# Altium PCB 电子脚扣终端主控板.PcbDoc
Units mil, origin at the board's own origin, x right, y up, seen from the top; angles counter-clockwise.
Board outline 1283.46 x 858.27 mil, 2 copper layers (Top Layer, Bottom Layer), stack 42.17 mil thick; 40 components, 27 nets, 159 pads, 28 vias.
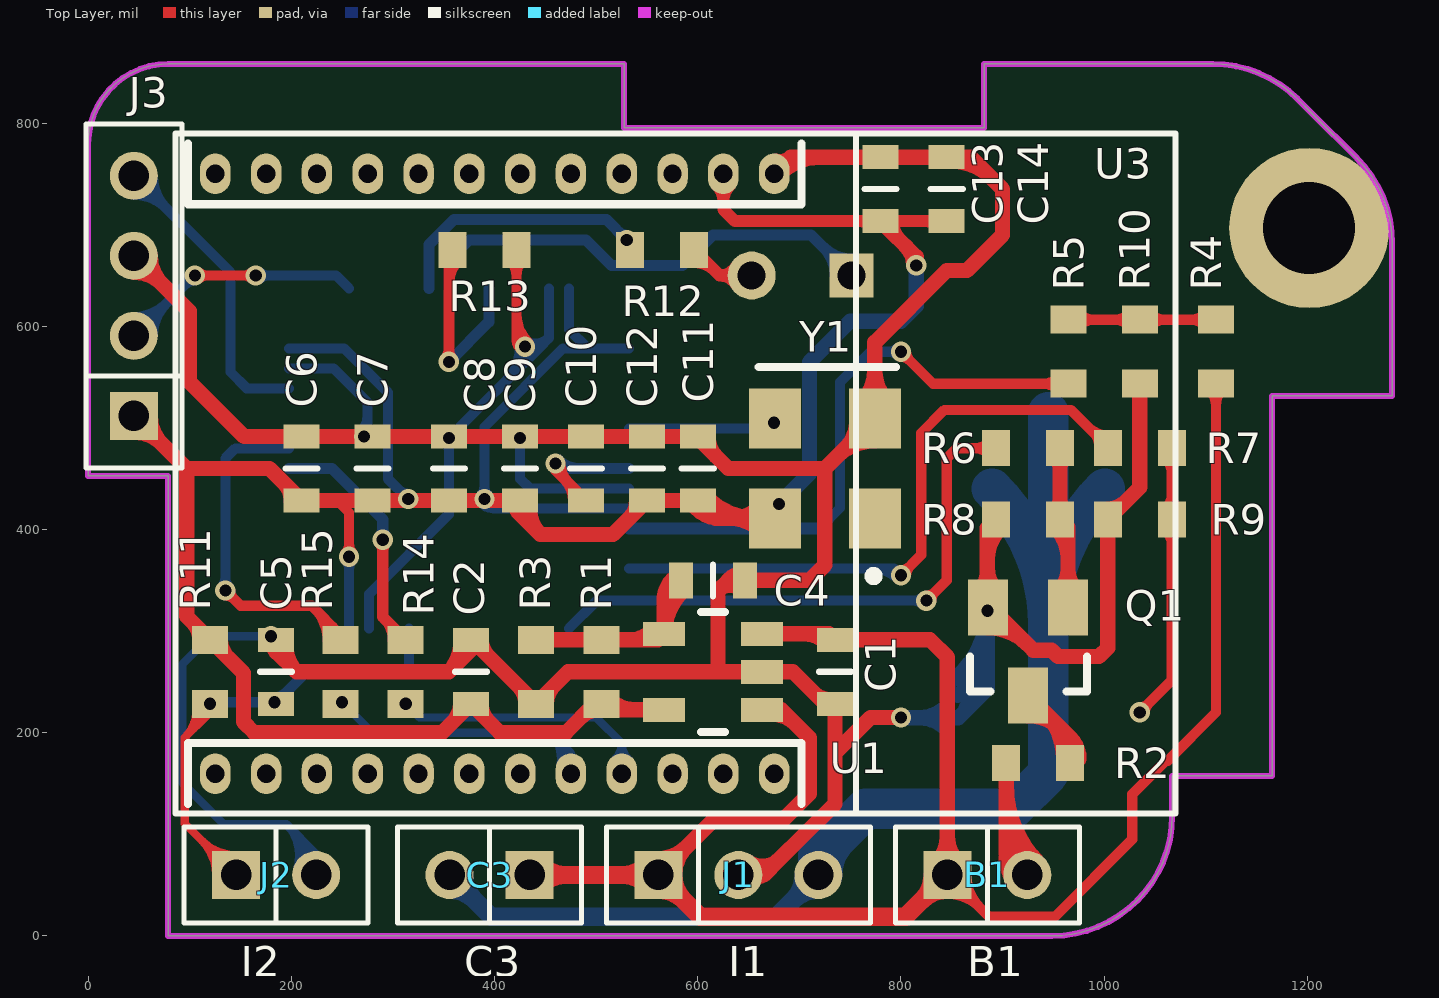
[diagram p0: Top Layer view]
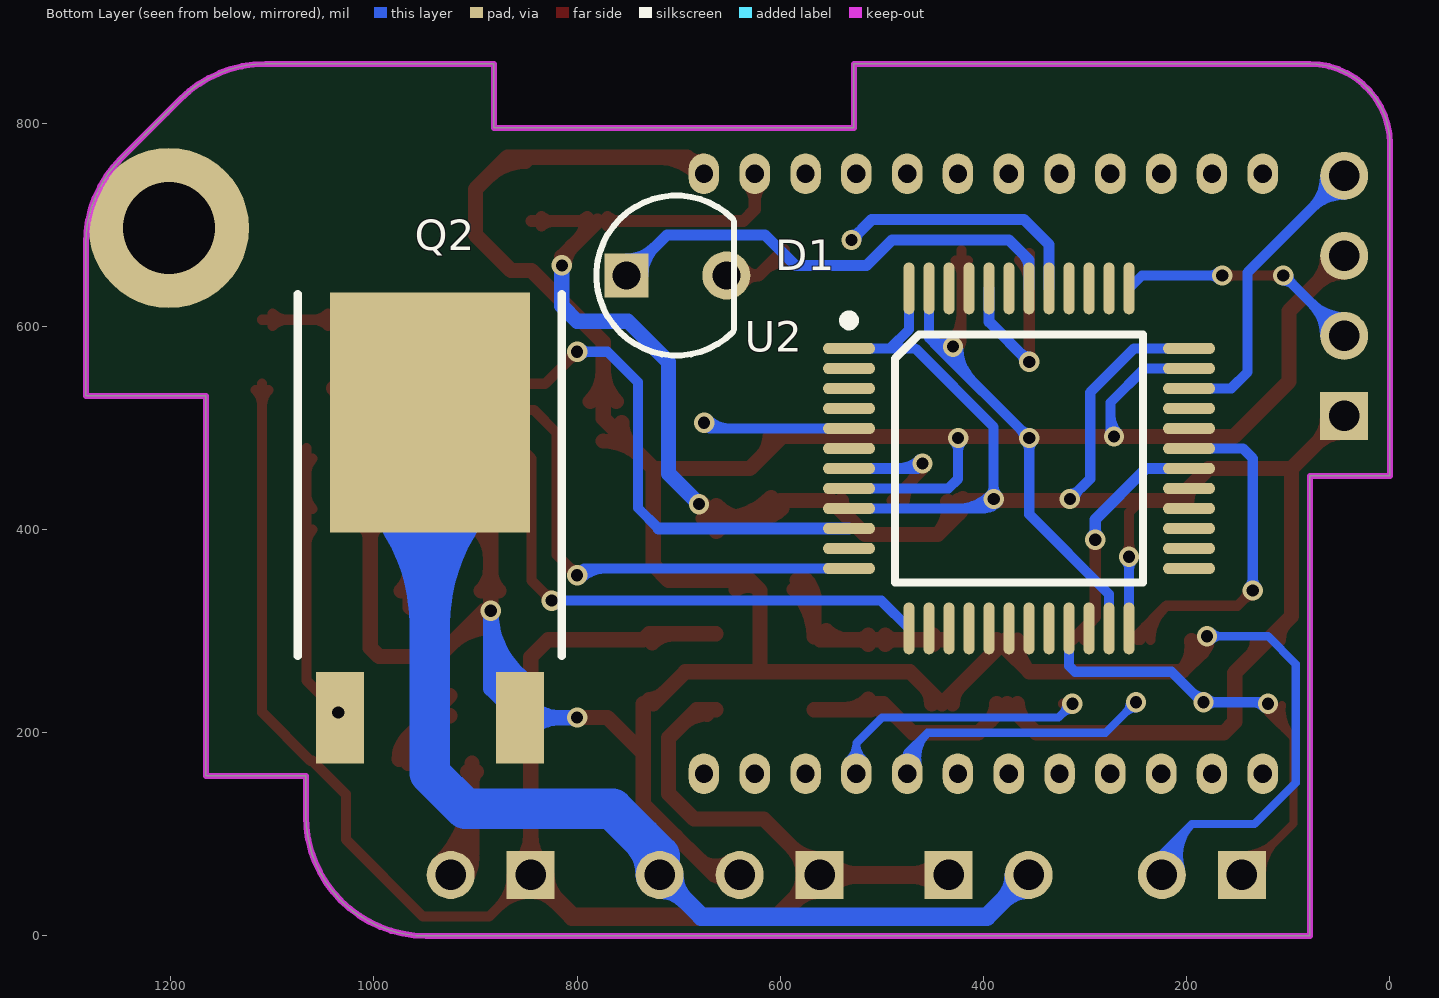
[diagram p1: Bottom Layer view, seen from below]
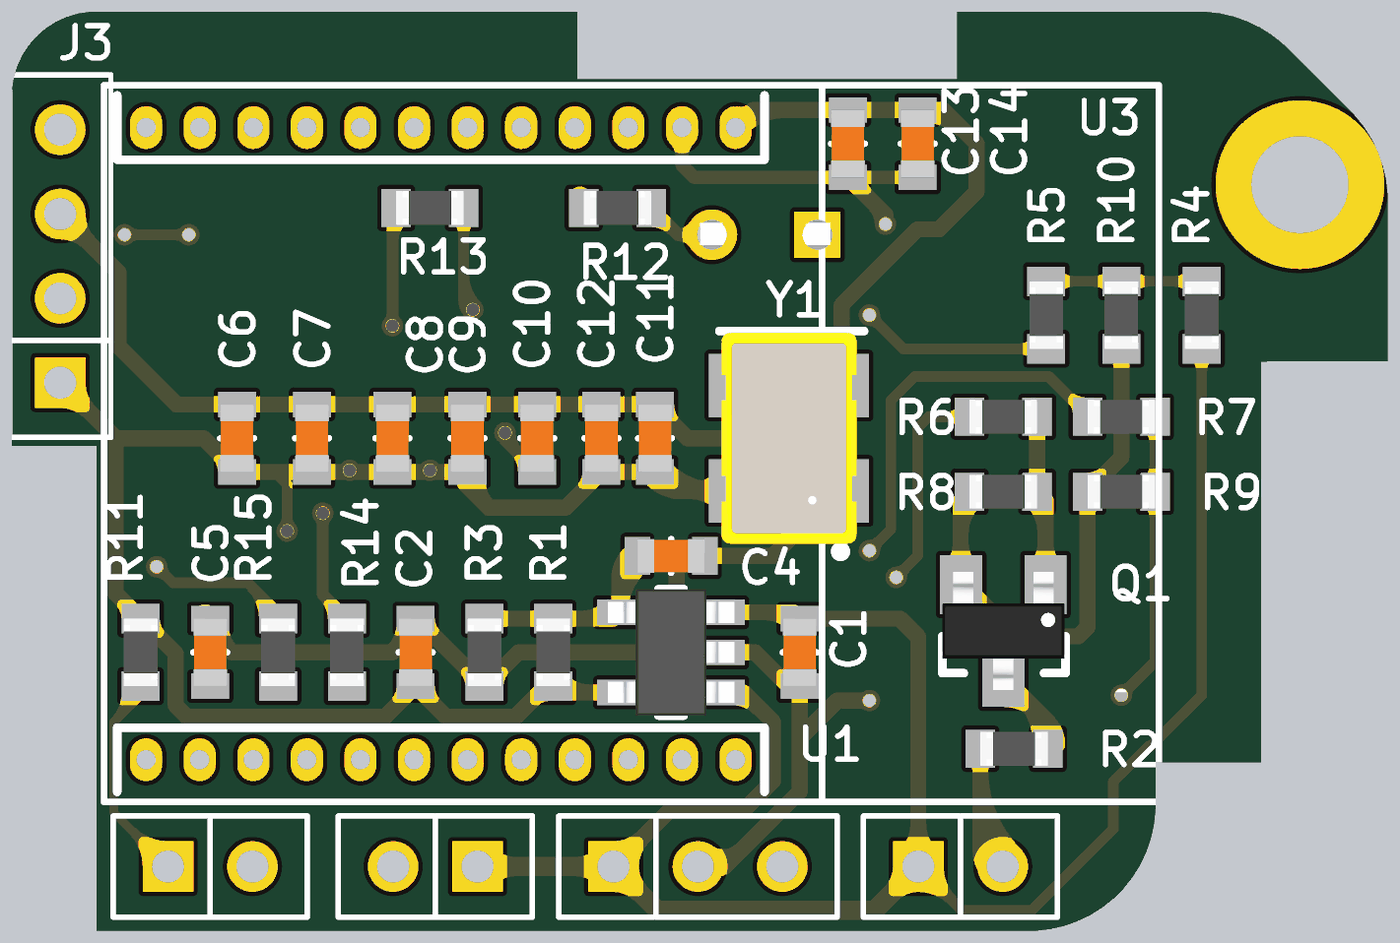
[diagram p2: 3D render of the assembled board from above, using the file's embedded part models]
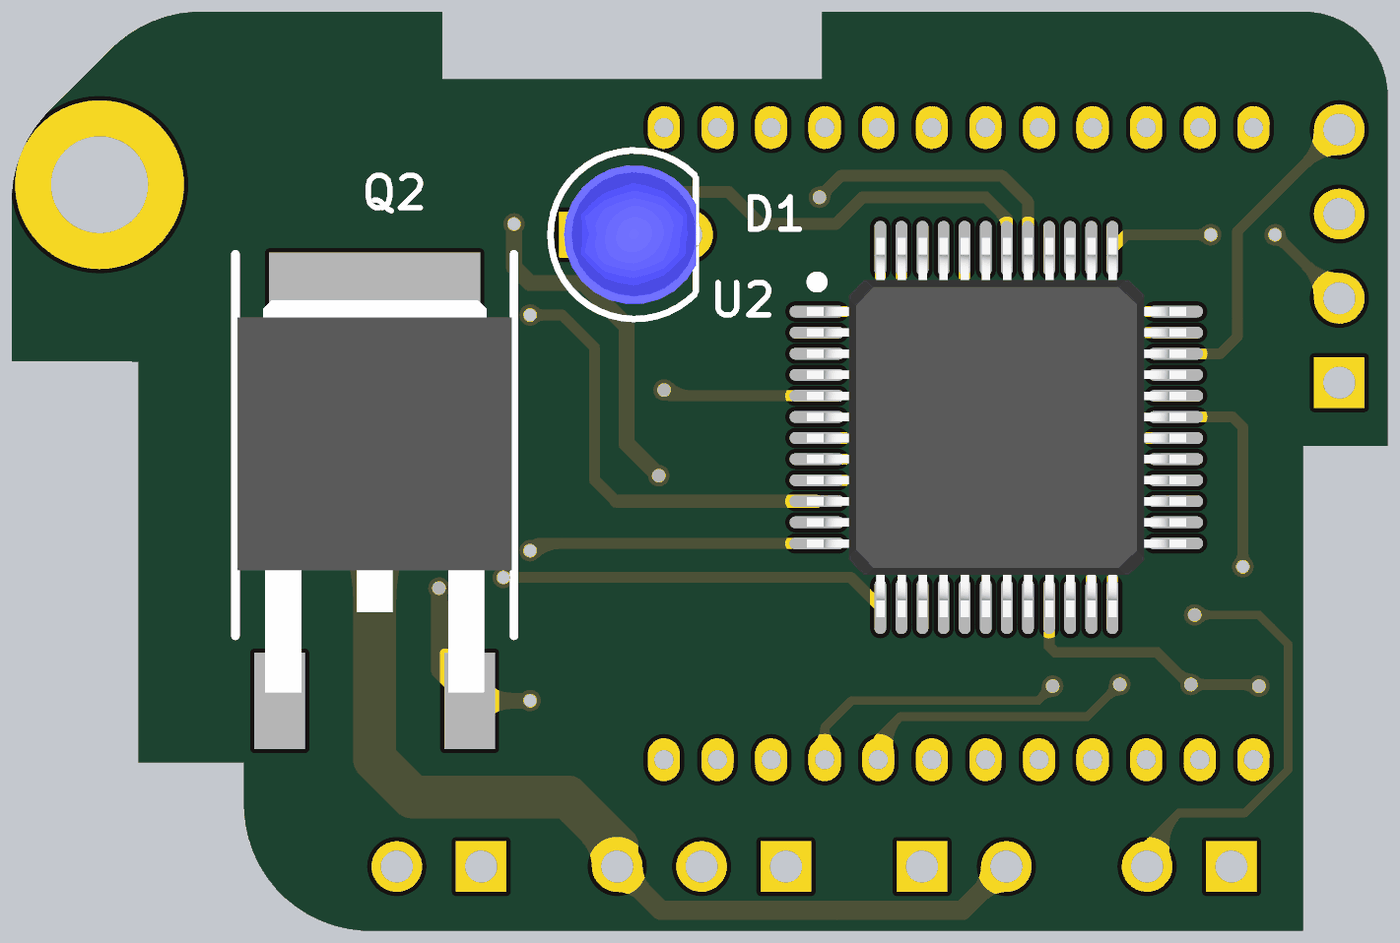
[diagram p3: 3D render of the assembled board from below, using the file's embedded part models]

## Layer stack, top to bottom
Top Solder: solder mask 0.4, Solder Resist, Dk 3.5
Top Layer: signal copper 1.4
Dielectric 1: dielectric 39.3701, FR-4, Dk 4.8
Bottom Layer: signal copper 1.4
Bottom Solder: solder mask 0.4, Solder Resist, Dk 3.5

## Board outline
78.73,0 78.73,452.76 -0.01,452.76 -0.01,779.53 cw(c78.73,779.53) 78.73,858.27 527.54,858.27 527.54,795.28 881.87,795.28 881.87,858.27 1106.88,858.27 cw(c1106.88,740.16) 1190.39,823.67 1203.83,810.24 1248.85,765.21 cw(c1165.34,681.7) 1283.45,681.7 1283.45,531.5 1165.34,531.5 1165.34,157.48 1066.91,157.48 1066.91,118.11 cw(c948.8,118.11) 948.8,0

## Design rules (kind name [scope] priority, off if disabled: settings)
Clearance [All] p1: gap=7
ComponentClearance [All] p1: gap=0 collisioncheckmode=3 verticalgap=0 showdistances=FALSE
Height [All] p1: minheight=0 maxheight=2000 prefheight=500
HoleSize [All] p1: absolutevalues=TRUE maxlimit=200 minlimit=1 maxpercent=80.000 minpercent=20.000
HoleToHoleClearance [All] p1: gap=6 allowstackedmicrovias=TRUE
MinimumSolderMaskSliver [All] p1: minsoldermaskwidth=0
PlaneConnect [All] p1: planeconnectstyle=Direct reliefexpansion=20 reliefentries=4 reliefconductorwidth=10 reliefairgap=10
PolygonConnect [All] p1: connectstyle=Direct reliefconductorwidth=10 reliefentries=4 polygonreliefangle="90 Angle" airgapwidth=10
RoutingVias [All] p1: holewidth=28 width=50 viastyle="Through Hole" minholewidth=8 minwidth=12 maxholewidth=200 maxwidth=300
SilkToSilkClearance [All] p1: silktosilkclearance=0
SilkToSolderMaskClearance [IsPad] p1: minsilkscreentomaskgap=0 clearancetoexposedcopper=TRUE
SolderMaskExpansion [All] p1: expansion=4
Width [All] p1: maxlimit=157.48 minlimit=8 preferedwidth=10
21 further rules are at their usual default settings.

## Components (designator, comment, footprint, x,y, rotation, side; value= is the part's Value field where it differs from the comment)
B1 "beep" Jk1*2-2.0 885,60 r0 top
C1 "10uF" C0603 735,260 r90 top
C2 "2.2uF" C0603 376.67,260 r90 top
C3 "470uF/16V" Jk1*2-2.0 395,60 r180 top
C4 "470pF" C0603 615,350 r0 top
C5 "0.1uF" C0603 185,260 r90 top
C6 "0.1uF" C0603 210,460 r90 top
C7 "0.1uF" C0603 280,460 r90 top
C8 "0.1uF" C0603 355,460 r90 top
C9 "0.1uF" C0603 425,460 r90 top
C10 "0.1uF" C0603 490,460 r90 top
C11 "10uF" C0603 600,460 r270 top
C12 "10uF" C0603 550,460 r270 top
C13 "0.1uF" C0603 780,735 r90 top
C14 "0.1uF" C0603 845,735 r90 top
D1 "LED" Led-D3 702.26,650 r180 bottom
J1 "Jack 1x3" Jk1*3-2.0 640,60 r0 top
J2 "Jack 1x2" Jk1*2-2.0 185,60 r0 top
J3 "SHD1X4-2.00" Jk1*4-2.0 45,630 r90 top
Q1 "S8050" SOT-23 925,280 r180 top
Q2 "NJD35N04G" TO-252 945,365 r180 bottom locked
R1 "300K" R0603 505,260 r90 top
R2 "0R" R0603 935,170 r180 top
R3 "100K" R0603 440.83,260 r270 top
R4 "5K" R0603 1110,575 r90 top
R5 "1K" R0603 965,575 r270 top
R6 "1K" R0603 925,480 r0 top
R7 "1K" R0603 1035,480 r0 top
R8 "1K" R0603 925,410 r0 top
R9 "1K" R0603 1035,410 r0 top
R10 "1K" R0603 1035,575 r270 top
R11 "1K" R0603 120,260 r270 top
R12 "1K" R0603 565,675 r0 top
R13 "100K" R0603 390,675 r0 top
R14 "10R" R0603 312.5,260 r270 top
R15 "10R" R0603 248.33,260 r270 top
U1 "MIC5219YM5" SOT-23-5 615,260 r180 top
U2 "STM32F103CB" LQF48 365,470 r180 bottom
U3 "ZG-Mxx" ZG-M0 400,455 r270 top locked
Y1 "XTAL 8MHz" XTAL5032 725,460 r90 top

## Footprints (in the part's own frame and the unit in brackets; to place one, negate y for a bottom-side part, rotate by r counter-clockwise, add the part's x,y. Pads: shape width x height; smd on the part's side, far side on the other; paste and mask are expansions set on the pad)
C0603 [mm]
  rect 0.6x0.9 smd: 1(-0.8,0) 2(0.8,0)
  silkscreen extent 0,-0.4 0,0.4, body extent -0.8,-0.4 0.8,0.4, height 0.5
Jk1*2-2.0 [mm]
  rect 1.2x1.2 hole 0.762: 1(-1,0)
  round 1.2 hole 0.762: 2(1,0)
  silkscreen extent -2.3,-1.2 2.3,1.2
Jk1*3-2.0 [mm]
  rect 1.2x1.2 hole 0.762: 1(-2,0)
  round 1.2 hole 0.762: 2(0,0) 3(2,0)
  silkscreen extent -3.3,-1.2 3.3,1.2
Jk1*4-2.0 [mm] "4P，直插，2.0mm间距，排母"
  rect 1.2x1.2 hole 0.762: 1(-3,0)
  round 1.2 hole 0.762: 2(-1,0) 3(1,0) 4(3,0)
  silkscreen extent -4.3,-1.2 4.3,1.2, body extent -4.25,-1.22 4.25,1.18, height 4.3
Led-D3 [mm]
  rect 1.1x1.1 hole 0.7: 1(-1.25,0)
  round 1.2 hole 0.7: 2(1.25,0)
  silkscreen extent -2,-2 1.44,2, body extent -1.68,-1.65 1.53,1.65, height 4.98
LQF48 [mm]
  oval 1.3x0.28 smd: 1(-4.25,2.75) 2(-4.25,2.25) 3(-4.25,1.75) 4(-4.25,1.25) 5(-4.25,0.75) 6(-4.25,0.25) 7(-4.25,-0.25) 8(-4.25,-0.75) 9(-4.25,-1.25) 10(-4.25,-1.75) 11(-4.25,-2.25) 12(-4.25,-2.75) 25(4.25,-2.75) 26(4.25,-2.25) 27(4.25,-1.75) 28(4.25,-1.25) 29(4.25,-0.75) 30(4.25,-0.25) 31(4.25,0.25) 32(4.25,0.75) 33(4.25,1.25) 34(4.25,1.75) 35(4.25,2.25) 36(4.25,2.75)
  oval 0.28x1.3 smd: 13(-2.75,-4.25) 14(-2.25,-4.25) 15(-1.75,-4.25) 16(-1.25,-4.25) 17(-0.75,-4.25) 18(-0.25,-4.25) 19(0.25,-4.25) 20(0.75,-4.25) 21(1.25,-4.25) 22(1.75,-4.25) 23(2.25,-4.25) 24(2.75,-4.25) 37(2.75,4.25) 38(2.25,4.25) 39(1.75,4.25) 40(1.25,4.25) 41(0.75,4.25) 42(0.25,4.25) 43(-0.25,4.25) 44(-0.75,4.25) 45(-1.25,4.25) 46(-1.75,4.25) 47(-2.25,4.25) 48(-2.75,4.25)
  silkscreen extent -4.38,-3.1 3.1,3.57, body extent -4.5,-4.5 4.5,4.5, height 1.8
R0603 [mm]
  rect 0.7x0.9 smd: 1(-0.8,0) 2(0.8,0)
  body extent -0.8,-0.4 0.8,0.4, height 0.37
SOT-23 [mm]
  rect 1x1.4 smd: 1(-1,-1.1) 2(1,-1.1) 3(0,1.1)
  silkscreen extent -1.47,0.13 1.45,1, body extent -1.45,-1.4 1.45,1.4, height 1.3
SOT-23-5 [mm]
  rect 1.05x0.6 smd: 1(-1.225,0.95) 2(-1.225,0) 3(-1.225,-0.95) 4(1.225,-0.95) 5(1.225,0.95)
  silkscreen extent -0.3,-1.5 0.3,1.5, body extent -1.5,-1.5 1.5,1.5, height 1.2
TO-252 [mm]
  rect 1.2x2.28 smd: 1(-2.25,-3.816) 3(2.25,-3.816)
  rect 5x6 smd: 2(0,3.816)
  silkscreen extent -3.3,-2.27 3.3,6.78, body extent -3.25,-3.62 3.25,5.68, height 2.3
XTAL5032 [mm]
  rect 1.5x1.3 smd: 1(-1.25,-1.25) 2(1.25,-1.25) 3(1.25,1.25) 4(-1.25,1.25)
  silkscreen extent -2.81,-1.78 2.54,1.65, body extent -2.5,-1.6 2.5,1.6, height 1.2
ZG-M0 [mil]
  oval 40x30 hole 18: A1(-295.1,275.15) A2(-295.1,225.15) A3(-295.1,175.15) A4(-295.1,125.15) A5(-295.1,75.15) A6(-295.1,25.15) A7(-295.1,-24.85) A8(-295.1,-74.85) A9(-295.1,-124.85) A10(-295.1,-174.85) A11(-295.1,-224.85) A12(-295.1,-274.85) B1(295.26,275.15) B2(295.26,225.15) B3(295.26,175.15) B4(295.26,125.15) B5(295.26,75.15) B6(295.26,25.15) B7(295.26,-24.85) B8(295.26,-74.85) B9(295.26,-124.85) B10(295.26,-174.85) B11(295.26,-224.85) B12(295.26,-274.85)
  silkscreen extent -335,-314 335,670

## Part data
B1: library part Speaker, "Loudspeaker"
C1 C5 C6 C7 C8 C9 C10 C11 C12: library part "Cap Semi"
C2 C4: library part CAP, "CAP"
C3: library part "Cap Poll"
C13 C14: library part Cap, "Capacitor"
J1 J2: "插座"
J3: library part HEADER1X4
Q1: "NPN triode, 0.5A Max"
Q2: library part MJD122
R1 R2 R3 R4 R5 R10 R12 R13: library part Res
R6 R7 R8 R9 R11: library part RES, "Resistor"
R14 R15: library part Res, "Resistor"
U1: library part MIC5205
U2: library part STM32F103Cx
Y1: library part XTAL

## Free pads (board coordinates)
  round 157.48 hole 90.55: ""(1201.71,696.76)

## Via types
v1: diameter 20, hole 12, Top Layer to Bottom Layer, tented both sides, 28 vias

## Nets (pads, with @x,y where several pads share a name; then routed paths per layer and width w, separated by ;. In a path a pad name is that pad's centre, name@x,y a point inside that pad or via, vN(x,y) a via of type N, cw(c..) or ccw(c..) an arc to the next point about the centre after c; other vN are vias at no path point)
+3.3V: C2.1 C6.1 C7.1 C8.1 C9.1 C11.2 C12.2 C13.1 C14.1 J3.1 R1.1 R11.1 U1.5 U2.1 U2.9 U2.24 U2.36 U2.48 U3.A2 Y1.4 | length 3646.5
  Top Layer w10: 245,428.5 256.73,416.77 v1(256.73,373.27) ; v1@253.2,376.8 ccw(c244.66,385.34) 256.73,385.34 ccw(c268.8,385.34) v1@260.27,376.8
  Top Layer w12: U3.A2@618.79,738.74 cw(c603.42,723.37) 625.15,723.37 cw(c646.88,723.37) U3.A2@631.52,738.74 ; U3.A2 625.15,714.85 636.5,703.5 C13.1 C14.1 ; C13.1@769.99,699.39 ccw(c760.07,689.47) 760.07,703.5 ccw(c760.07,717.53) C13.1@769.99,707.61 ; C13.1@790.01,699.39 cw(c799.93,689.47) 799.93,703.5 cw(c799.93,717.53) C13.1@790.01,707.61 ; C14.1@834.99,699.39 ccw(c825.07,689.47) 825.07,703.5 ccw(c825.07,717.53) C14.1@834.99,707.61
  Top Layer w15: J3.1@45,495.77 cw(c45,456.85) 72.52,484.37 cw(c100.04,511.89) J3.1@61.12,511.89 ; J3.1 96.89,460 ; 102.56,308.94 cw(c85.12,291.5) R11.1@109.78,291.5 ; R11.1@130.22,291.5 ccw(c154.88,291.5) 137.44,274.06 ; 192.56,445.94 cw(c175.12,428.5) C6.1@199.78,428.5 ; 359.23,211.06 ccw(c341.79,228.5) C2.1@366.45,228.5 ; C2.1@386.88,228.5 ccw(c411.55,228.5) 394.11,211.06 ; C9.1@420.43,430.61 ccw(c437.57,427.16) 425.21,414.79 ; C9.1@435.13,427.65 ccw(c470.53,420.53) 445,395 ; 485.97,215.97 cw(c501.06,200.89) R1.1@501.06,222.22 ; R1.1@513.38,232.94 ccw(c538.35,257.92) 538.35,222.6 ; 532.56,411.06 ccw(c515.12,428.5) C12.2@539.78,428.5 ; U1.5 510.91,222.6 R1.1 498.5,228.5 470,200 405.17,200 C2.1 348.16,200 163.47,200 152.78,210.69 152.78,258.71 R11.1 96.89,314.61 96.89,460 ; C11.2@598.35,420.95 ccw(c622.87,445.47) 622.87,410.79 ; C11.2@608.95,431.55 ccw(c659.08,481.68) Y1.4@659.08,410.79 ; C11.2@610.22,428.5 ccw(c634.88,428.5) 617.44,411.06 ; 639.65,410.79 ccw(c639.65,465.35) Y1.4@678.23,426.77 ; Y1.4@663,398 ccw(c632.11,367.11) 632.11,410.79 ccw(c632.11,454.46) Y1.4@663,423.58 ; Y1.4 617.72,410.79 C11.2 C12.2 516.5,395 445,395 ; C13.1 815,668.5 v1(815,660) ; C13.1@790.22,703.5 ccw(c814.88,703.5) 797.44,686.06 ; 804.72,678.78 cw(c785.93,660) v1@812.5,660 ; 96.89,460 178.5,460 C6.1 245,428.5 C7.1 C8.1 C9.1 425,415 445,395
  Bottom Layer w10: U2.36 251.73,578.27 295,535 295,450 v1(315,430) ; v1@253.2,369.73 cw(c244.66,361.2) 256.73,361.2 cw(c268.8,361.2) v1@260.27,369.73 ; U2.24 v1(256.73,373.27) ; v1@310,430 ccw(c297.93,430) 306.46,438.54 ccw(c315,447.07) v1@315,435 ; v1@386.46,426.46 ccw(c400.17,440.17) 400.17,420.79 ; v1@386.46,433.54 ccw(c377.93,442.07) 390,442.07 ccw(c402.07,442.07) 393.54,433.54 ccw(c424.31,464.31) 424.31,420.79 ; U2.48 473.27,596.73 491.73,578.27 ; U2.9 399.21,420.79 v1(390,430) 390,500.96 467.31,578.27 491.73,578.27 ; U2.1 491.73,578.27
  Bottom Layer w15: v1(680,425) 710,455 710,565 750,605 800,605 815,620 v1(815,660)
ADPOW: R5.2 U2.10 | length 661.5
  Top Layer w10: v1@800,570 cw(c800,557.93) 808.54,566.46 cw(c817.07,575) v1@805,575 ; v1(800,575) 831.5,543.5 R5.2 ; R5.2@954.85,537.3 ccw(c939.87,522.31) 939.87,543.5 ccw(c939.87,564.7) R5.2@954.85,549.71
  Bottom Layer w10: 720,401.1 740,421.1 740,545 770,575 v1(800,575) ; v1@796.46,571.46 ccw(c787.93,562.93) 787.93,575 ccw(c787.93,587.07) v1@796.46,578.54
  Bottom Layer w12: U2.10 720,401.1
BAT: B1.1 C1.2 C3.1 J1.1 R4.1 U1.1 U1.3 | length 2360.5
  Top Layer w10: B1.1@845.63,41.38 cw(c845.63,-3.58) 877.42,28.21 cw(c909.21,60) B1.1@864.25,60 ; B1.1 886.63,19 951.59,19 1027.59,95 1027.59,139.37 1060.7,172.48 1062.48,172.48 1110,220 R4.1 ; R4.1@1103.79,537.3 cw(c1088.8,522.31) 1110,522.31 cw(c1131.2,522.31) R4.1@1116.21,537.3
  Top Layer w15: J1.1 616.26,115 685,115 710,140 710,195 682.4,222.6 U1.1 ; J1.1@561.26,76.12 ccw(c561.26,115.04) 588.78,87.52 ccw(c616.3,60) J1.1@577.38,60 ; U1.3 729.09,297.4 C1.2 828.5,291.5 845.63,274.37 B1.1 ; U1.1@672.09,218.29 cw(c672.09,182.98) 697.05,207.95 ; 704.43,297.4 cw(c704.43,266.83) C1.2@726.05,288.45 ; B1.1@834.23,71.4 ccw(c806.71,98.92) 845.63,98.92 ccw(c884.55,98.92) B1.1@857.03,71.4
  Top Layer w18: C3.1 J1.1 602.26,19 804.63,19 B1.1 ; C3.1@444.71,49.66 cw(c469.67,24.7) 469.67,60 cw(c469.67,95.3) C3.1@444.71,70.34 ; J1.1@550.92,49.66 ccw(c525.96,24.7) 525.96,60 ccw(c525.96,95.3) J1.1@550.92,70.34 ; J1.1@561.26,45.38 cw(c561.26,10.08) 586.22,35.04 cw(c611.18,60) J1.1@575.88,60 ; B1.1@831.01,60 cw(c795.71,60) 820.67,35.04 cw(c845.63,10.08) B1.1@845.63,45.38
BOOT0: R13.1 U2.44 | length 254.4
  Top Layer w11: v1@351.82,568.18 ccw(c344.14,575.86) 355,575.86 ccw(c365.86,575.86) v1@358.18,568.18 ; v1(355,565) R13.1@355,671.5 ; 355,642.62 cw(c386.95,642.62) R13.1@364.36,665.21
  Bottom Layer w11: v1(355,565) 394.53,604.53 U2.44 ; v1@355,569.5 ccw(c355,580.36) 362.68,572.68 ccw(c370.36,565) v1@359.5,565
CTRBEEP: R6.1 U2.13 | length 635.2
  Top Layer w10: v1(825,330) 845,350 845,470 855,480 R6.1 ; v1@825,335 ccw(c825,347.07) 833.54,338.54 ccw(c842.07,330) v1@830,330 ; R6.1@887.3,473.79 ccw(c872.31,458.8) 872.31,480 ccw(c872.31,501.2) R6.1@887.3,486.21
  Bottom Layer w10: U2.13 500.59,330 v1(825,330) ; v1@821.46,326.46 ccw(c812.93,317.93) 812.93,330 ccw(c812.93,342.07) v1@821.46,333.54
CTRSHOCK: R7.1 U2.12 | length 707.9
  Top Layer w10: v1(800,355) 820,375 820,495 842.72,517.72 967.24,517.72 1003.5,481.46 R7.1 ; v1@800,360 ccw(c800,372.07) 808.54,363.54 ccw(c817.07,355) v1@805,355 ; 984.29,500.68 ccw(c1003.5,519.89) R7.1@1003.5,492.72 ; R7.1@990.27,494.69 cw(c979.51,483.94) R7.1@994.72,483.94
  Bottom Layer w10: U2.12 793.27,361.73 v1(800,355) ; 771.68,361.73 cw(c771.68,326.68) v1@796.46,351.46
DECCUT: C5.1 J2.1 R11.2 U2.21 | length 723.6
  Top Layer w8: 103.74,203.74 ccw(c78.98,228.5) R11.2@114,228.5 ; R11.2@106.34,227.41 cw(c67.02,222.99) 95,195 ; 106.75,206.75 ccw(c88.14,225.36) R11.2@114.29,228.3 ; R11.2@113.15,220.72 cw(c127.32,218.58) R11.2@118.81,230.11 ; R11.2@117.4,217.4 ccw(c106.3,228.5) R11.2@122,228.5 ; v1(120,228.5) 120,220 95,195 ; J2.1@126.01,60 ccw(c78.64,60) 112.13,93.5 ccw(c145.63,126.99) J2.1@145.63,79.62 ; J2.1@134.01,60 ccw(c105.95,60) 125.79,79.84 ccw(c145.63,99.68) J2.1@145.63,71.62 ; J2.1 95,110.63 95,195
  Top Layer w10: v1(183.5,230) C5.1
  Bottom Layer w10: v1(120,228.5) 121.5,230 v1(183.5,230) 185,230 215,260 310,260 315.79,265.79 U2.21 ; v1@123.54,224.97 cw(c135.68,212.82) 135.68,230 ; v1@179.97,226.46 ccw(c171.43,217.93) 171.43,230 ccw(c171.43,242.07) v1@179.97,233.54 ; v1@183.5,235 ccw(c183.5,250.68) 194.59,239.59
GND: C1.1 C2.2 C4.2 C5.2 C6.2 C7.2 C8.2 C9.2 C10.2 C11.1 C12.1 C13.2 C14.2 J1.2 J2.2 J3.3 Q1.2 Q2.3 R3.2 R8.1 R9.1 R10.2 R13.2 U1.2 U2.8 U2.23 U2.35 U2.47 U3.A1 Y1.2 | length 6079.2
  Top Layer w10: R13.2@415.29,664.85 cw(c400.3,649.87) 421.5,649.87 cw(c442.69,649.87) R13.2@427.7,664.85 ; 421.5,588.46 ccw(c438.46,588.46) v1@426.46,576.46 ; 421.5,612.6 ccw(c462.6,612.6) v1@433.54,583.54 ; R13.2 421.5,588.5 ; v1@425,580.01 ccw(c413.04,580.05) 421.5,588.5 ; v1(430,580) 421.5,588.5 ; v1@429.99,585 cw(c429.95,596.96) 421.5,588.5
  Top Layer w15: J3.3@45,653.25 cw(c45,614.33) 72.52,641.85 cw(c100.04,669.37) J3.3@61.12,669.37 ; J3.3 99.37,615 99.37,545.63 153.5,491.5 C6.2 v1(271.5,491.5) C7.2 C8.2 C9.2 C10.2 C12.1 C11.1 600,490 630,460 725,460 ; C5.2@178.42,293.06 cw(c167.08,279.19) 185,279.19 ; C5.2@180.36,293.27 ccw(c194.7,290.86) C5.2@184.42,280.58 ; C5.2@182.3,294.02 ccw(c194,289) C5.2@185,280 ; C5.2@182.5,295 ccw(c212.68,295) 191.34,273.66 ; C5.2 C5.2@185,280 ; C5.2@195.16,290.78 ccw(c229.94,284.94) 205,260 ; C2.2@366.46,291.15 cw(c327.02,287.98) 355,260 ; C2.2@386.88,291.5 ccw(c408.71,291.5) 393.28,276.06 ; 423.39,245.94 cw(c405.95,228.5) R3.2@430.62,228.5 ; R3.2@451.05,228.5 cw(c475.71,228.5) 458.27,245.94 ; C11.1@610.22,491.5 ccw(c638.49,491.5) 618.5,471.5 ; 631.39,351.39 cw(c642.86,339.91) C4.2@653.5,352.17 ; J1.2 665,60 ; J1.2@640.66,60.91 ccw(c653.09,78.19) 668.14,63.14 ; C4.2@643.67,340.84 ccw(c632.29,327.72) 620,340 ; J1.2@649.41,73.09 ccw(c663.53,92.71) 680.62,75.62 ; J1.2@654.69,53.35 cw(c665,48.68) 665,60 ; J1.2@654.69,66.65 ccw(c665,71.32) 665,60 ; U3.A1 691.55,766.5 ; U3.A1@676.92,762.39 ccw(c680.58,777.46) 691.54,766.5 ; U3.A1@680.45,749.8 cw(c720.77,709.49) 720.77,766.5 ; 714.75,238.76 ccw(c729.09,253.11) C1.1@729.09,232.81 ; C1.1@725,228.5 693.5,260 U1.2 620,260 ; C1.1 735,180 ; 736.61,471.61 cw(c774.21,434.01) Y1.2@774.21,487.19 ; 746.11,481.11 ccw(c721.95,505.28) Y1.2@756.12,505.28 ; Y1.2@761.42,525.94 ccw(c730.54,556.82) 774.21,556.82 ccw(c817.89,556.82) Y1.2@787,525.94 ; v1(800,215) 770,215 735,180 ; C14.2@850.91,762.19 cw(c850.91,709.29) 888.31,746.69 ; Q1.2@877.01,339.8 ccw(c857.73,359.08) 885,359.08 ; Q1.2@885,317.5 cw(c885,295.93) Q1.2@900.25,311.18 ; 885,362.12 ccw(c916.57,362.12) Q1.2@894.25,339.8 ; 885,370.37 cw(c929.19,370.37) R8.1@897.94,401.62 ; Q1.2@885.63,303.25 cw(c885.63,248.8) 924.13,287.3 ; R8.1 885,401.5 v1(885,320) 891.43,320 930.18,281.25 948.2,281.25 954.44,275 995,275 1003.5,283.5 R9.1 1035,441.5 R10.2 ; R9.1@999.06,401.62 cw(c988.34,390.9) 1003.5,390.9 cw(c1018.66,390.9) R9.1@1007.94,401.62 ; R9.1@1003.5,420.22 ccw(c1003.5,444.88) 1020.94,427.44 ; R10.2@1030.56,539.06 cw(c1019.84,528.34) 1035,528.34 cw(c1050.16,528.34) R10.2@1039.44,539.06 ; C5.2@185,280 205,260 ; 205,260 355,260 ; 355,260 376.67,281.67 C2.2 377.84,291.5 R3.2 472.33,260 620,260 ; 620,260 620,340 ; 620,340 630,350 C4.2 710,350 725,365 725,460 ; 665,60 680.62,75.62 ; 680.62,75.62 680.62,75.79 702.95,98.12 703.12,98.12 735,130 735,180 ; 691.55,766.5 C13.2 C14.2 868.5,766.5 900,735 900,690 865,655 845,655 774.21,584.21 Y1.2 725,460
  Bottom Layer w8: v1@175.76,290.76 ccw(c165.51,280.51) 165.51,295 ccw(c165.51,309.49) v1@175.76,299.24 ; v1(180,295) 120,295 92.73,267.73 92.73,150.4 133.12,110 195,110 ; 204.28,100.72 cw(c178.29,74.73) J2.2@213.3,63.54 ; J2.2@205.68,65.98 ccw(c164.23,79.23) 195,110 ; 213.56,91.44 cw(c192.36,70.23) J2.2@220.92,61.1 ; J2.2 224.37,80.63 195,110
  Bottom Layer w10: U2.35 241.42,558.58 275,525 275,495 v1(271.5,491.5) ; v1@267.96,495.03 ccw(c250.97,512.03) 275,512.03 ; U2.23 276.42,336.42 355,415 v1(355,490) 445,580 ; v1@351.46,486.46 cw(c342.93,477.93) 355,477.93 cw(c367.07,477.93) v1@358.54,486.46 ; v1@355,495 ccw(c355,507.07) 363.54,498.54 ccw(c372.07,490) v1@360,490 ; 410.86,545.86 ccw(c376.72,580) v1@425,580 ; v1@421.46,486.46 cw(c412.93,477.93) 425,477.93 cw(c437.07,477.93) v1@428.54,486.46 ; v1(425,490) 425,450 434.53,440.47 U2.8 ; 427.93,562.93 ccw(c410.86,580) v1@435,580 ; v1@427.97,575.43 ccw(c433.55,588) 443.28,578.28 ; v1(430,580) 445,580 ; v1@432.03,584.57 ccw(c439.88,602.28) 453.58,588.58 ; v1@433.54,576.46 cw(c442.07,567.93) 442.07,580 cw(c442.07,592.07) v1@433.54,583.54 ; U2.47 453.58,588.58 ; 445,580 453.58,588.58
  Bottom Layer w15: v1(800,215) 800.24,214.76 Q2.3 885,243.35 v1(885,320) cw(c799.9,320) Q2.3@847.42,249.4 ; Q2.3@845.02,203.36 ccw(c817.5,175.84) 817.5,214.76 ccw(c817.5,253.69) Q2.3@845.02,226.16 ; Q2.3@855.79,236.95 ccw(c818.87,291.82) 885,291.82 ; Q2.3@864.17,224.51 ccw(c837.83,263.64) 885,263.64
LEDGREEN: R12.1 U2.41 | length 278.1
  Top Layer w11: v1(530,685) R12.1@533.5,681.5
  Bottom Layer w11: U2.41 335.47,680.47 360,705 510,705 v1(530,685) ; v1@525.5,685 ccw(c514.64,685) 522.32,692.68 ccw(c530,700.36) v1@530,689.5
LEDRED: D1.1 U2.42 | length 547.7
  Bottom Layer w11: U2.42 355.16,665.16 375,685 490,685 515,660 585,660 615,690 711.47,690 D1.1 ; U2.42@355.17,657.4 cw(c373.92,657.4) 360.66,670.66 ; D1.1@735.31,650 ccw(c696.32,650) 723.89,677.58 ccw(c751.47,705.15) D1.1@751.47,666.15
NetB1_2: B1.2 R2.2 | length 354.6
  Top Layer w15: R2.2@899.06,161.62 cw(c888.34,150.9) 903.5,150.9 cw(c918.66,150.9) R2.2@907.94,161.62 ; 903.5,76.87 ccw(c941.24,76.87) B1.2@914.56,50.19 ; 903.5,113.08 ccw(c977.45,113.08) B1.2@925.16,60.79 ; 903.5,149.3 ccw(c1013.67,149.3) B1.2@935.77,71.4 ; R2.2 903.5,80.87 ; B1.2@908.62,63.43 ccw(c890.11,67.47) 903.5,80.87 ; B1.2@920.94,75.75 cw(c916.9,94.26) 903.5,80.87 ; B1.2 903.5,80.87
NetC4_1: C4.1 R1.2 R3.1 U1.4 | length 378.1
  Top Layer w15: R3.1 R1.2 560.87,291.5 U1.4 566.77,333.27 ; R3.1@449.21,287.06 cw(c459.93,276.34) 459.93,291.5 cw(c459.93,306.66) R3.1@449.21,295.94 ; R1.2@496.62,287.06 ccw(c485.9,276.34) 485.9,291.5 ccw(c485.9,306.66) R1.2@496.62,295.94 ; R1.2@513.38,287.06 cw(c524.1,276.34) 524.1,291.5 cw(c524.1,306.66) R1.2@513.38,295.94 ; 533.25,291.5 ccw(c533.25,322.07) U1.4@554.86,300.45 ; U1.4@566.77,294.5 cw(c631.43,294.5) C4.1@586.5,340.99 ; 566.77,329.85 cw(c597.27,329.85) C4.1@576.08,351.78 ; C4.1@583.35,339.79 ccw(c582.54,317.5) 566.77,333.27 ; C4.1 566.77,333.27
NetD1_2: D1.2 R12.2 | length 128.7
  Top Layer w12: R12.2@596.5,663.28 cw(c596.5,635) 616.5,655 ; R12.2 621.5,650 ; D1.2@638.04,640.76 ccw(c621.5,630.58) 621.5,650 ; D1.2@638.04,659.24 cw(c621.5,669.42) 621.5,650 ; D1.2 621.5,650
NetQ1_1: Q1.1 R6.2 R8.2 | length 286.8
  Top Layer w15: R8.2@952.06,401.62 cw(c922.33,371.89) 964.37,371.89 ; R8.2@952.06,418.38 ccw(c941.34,429.1) 956.5,429.1 ccw(c971.66,429.1) R8.2@960.94,418.38 ; R6.2@952.06,471.62 cw(c941.34,460.9) 956.5,460.9 cw(c971.66,460.9) R6.2@960.94,471.62 ; Q1.1@955.75,339.8 ccw(c934.95,360.6) 964.37,360.6 ccw(c993.79,360.6) Q1.1@972.99,339.8 ; R6.2 R8.2 964.37,402.13 Q1.1
NetQ1_3: Q1.3 R2.1 | length 221.7
  Top Layer w15: Q1.3@925,216.63 cw(c925,168.21) 959.24,202.45 ; Q1.3 966.5,195.2 R2.1 ; Q1.3@940.74,220.95 cw(c893.73,173.94) R2.1@960.22,173.94 ; R2.1@962.06,178.38 ccw(c951.34,189.1) 966.5,189.1 ccw(c981.66,189.1) R2.1@970.94,178.38 ; 966.35,195.34 cw(c944.94,173.94) R2.1@975.22,173.94
NetQ2_1: Q2.1 R7.2 R9.2 | length 391.9
  Top Layer w10: v1(1035,220) 1066.5,251.5 R9.2 R7.2 ; v1@1035,225 ccw(c1035,237.07) 1043.54,228.54 ccw(c1052.07,220) v1@1040,220 ; R9.2@1060.29,399.85 cw(c1045.3,384.87) 1066.5,384.87 cw(c1087.69,384.87) R9.2@1072.7,399.85 ; R9.2@1060.29,420.15 ccw(c1045.3,435.13) 1066.5,435.13 ccw(c1087.69,435.13) R9.2@1072.7,420.15 ; R7.2@1060.29,469.85 cw(c1045.3,454.87) 1066.5,454.87 cw(c1087.69,454.87) R7.2@1072.7,469.85
NetR4_2: R4.2 R5.1 R10.1 | length 278.2
  Top Layer w10: R5.1 R10.1 R4.2 ; R5.1@975.15,600.29 cw(c990.13,585.3) 990.13,606.5 cw(c990.13,627.69) R5.1@975.15,612.7 ; R10.1@1024.85,600.29 ccw(c1009.87,585.3) 1009.87,606.5 ccw(c1009.87,627.69) R10.1@1024.85,612.7 ; R10.1@1045.15,600.29 cw(c1060.13,585.3) 1060.13,606.5 cw(c1060.13,627.69) R10.1@1045.15,612.7 ; R4.2@1099.85,600.29 ccw(c1084.87,585.3) 1084.87,606.5 ccw(c1084.87,627.69) R4.2@1099.85,612.7
NetR14_2: R14.2 U3.B4 | length 333.7
  Top Layer w10: v1(312.5,228.5) 321.5,228.5 R14.2@317.99,225
  Bottom Layer w8: v1@312.5,222.5 cw(c312.5,208.02) 322.74,218.26 cw(c332.99,228.5) v1@318.5,228.5 ; v1(312.5,228.5) 326,215 500,215 525.15,189.85 ; U3.B4@517.69,172.83 ccw(c502,189.85) 525.15,189.85 ; U3.B4 525.15,189.85 ; U3.B4@532.61,172.83 cw(c548.3,189.85) 525.15,189.85
NetR15_2: R15.2 U3.B5 | length 365.4
  Top Layer w10: R15.2 v1(249.83,230)
  Bottom Layer w8: v1@249.83,224 cw(c249.83,209.1) 260.36,219.64 ; v1(249.83,230) 250,230 280,200 455,200 ; v1@255.83,230 ccw(c269.9,230) 259.95,220.05 ; U3.B5@464.43,167.2 ccw(c430.08,175.08) 455,200 ; 465.22,189.78 cw(c446.71,171.27) U3.B5@472.23,165.41 ; U3.B5@471.77,175.21 ccw(c470.28,179.85) 475.15,179.85 ; U3.B5 475.15,179.85 ; U3.B5@478.53,175.21 cw(c480.03,179.85) 475.15,179.85 ; 455,200 475.15,179.85
NRST: C10.1 U2.7 | length 188.8
  Top Layer w11: v1(460,465) 460,458.5 C10.1 ; v1@464.5,465 ccw(c491.05,465) 472.28,446.23 ; 469.15,449.36 cw(c448.29,428.5) C10.1@477.78,428.5
  Bottom Layer w11: v1(460,465) 464.84,460.16 U2.7 ; v1@463.18,468.18 ccw(c482.55,487.55) 482.55,460.16
SHOCK-: C3.2 J1.3 Q2.2 | length 1481.7
  Bottom Layer w18: C3.2@355.63,45.38 cw(c355.63,10.08) 380.59,35.04 cw(c405.55,60) C3.2@370.25,60 ; C3.2 396.63,19 677.74,19 J1.3 ; J1.3@704.12,60 cw(c668.82,60) 693.78,35.04 cw(c718.74,10.08) J1.3@718.74,45.38
  Bottom Layer w40: J1.3 718.74,78.74 765,125 910,125 945,160 Q2.2 ; J1.3@722.36,60 cw(c776.35,60) 738.17,98.17 ; Q2.2@889.55,440.1 cw(c755.66,306.22) 945,306.22 cw(c1134.34,306.22) Q2.2@1000.45,440.1
SWCLK: J3.2 U2.37 | length 388
  Top Layer w10: v1(105,650) v1(165,650) ; v1@108.54,646.46 cw(c117.07,637.93) 117.07,650 cw(c117.07,662.07) v1@108.54,653.54 ; v1@161.46,646.46 ccw(c152.93,637.93) 152.93,650 ccw(c152.93,662.07) v1@161.46,653.54
  Bottom Layer w10: J3.2 104.37,650 v1(105,650) ; J3.2@45,609.25 ccw(c45,654.21) 76.79,622.42 ccw(c108.58,590.63) J3.2@63.62,590.63 ; 95.39,641.02 cw(c105,631.41) v1@105,645 ; 96.91,642.54 ccw(c89.45,650) v1@100,650 ; v1(165,650) 244.06,650 U2.37 ; v1@168.54,646.46 cw(c177.07,637.93) 177.07,650 cw(c177.07,662.07) v1@168.54,653.54
SWDIO: J3.4 U2.34 | length 367.4
  Bottom Layer w10: J3.4@45,729.49 cw(c45,684.53) 76.79,716.32 cw(c108.58,748.11) J3.4@63.62,748.11 ; J3.4 140,653.11 140,555 156.1,538.9 U2.34
TESTLED1: U2.45
TTL1_RX: R15.1 U2.31 | length 420
  Top Layer w10: v1@135,335 cw(c135,322.93) 143.54,331.46 cw(c152.07,340) v1@140,340 ; v1(135,340) 150,325 220,325 248.33,296.67 R15.1 ; 222.97,322.03 cw(c192.43,291.5) R15.1@235.62,291.5 ; R15.1@240.04,304.96 cw(c226.58,291.5) R15.1@245.62,291.5
  Bottom Layer w10: v1@131.46,343.54 ccw(c122.93,352.07) 135,352.07 ccw(c147.07,352.07) v1@138.54,343.54 ; v1(135,340) 135,470 144.84,479.84 U2.31
TTL1_TX: R14.1 U2.30 | length 298.2
  Top Layer w11: v1@286.82,386.82 cw(c279.14,379.14) 290,379.14 cw(c300.86,379.14) v1@293.18,386.82 ; v1(290,390) 290,314 R14.1 ; 291.64,312.35 cw(c270.79,291.5) R14.1@300.28,291.5
  Bottom Layer w11: U2.30 239.84,460.16 290,410 v1(290,390) ; v1@286.82,393.18 ccw(c279.14,400.86) 290,400.86 ccw(c300.86,400.86) v1@293.18,393.18
XTAL: U2.5 Y1.3 | length 169.1
  Bottom Layer w10: U2.5 669.53,499.53 v1(675,505) ; 649.72,499.53 ccw(c649.72,530.28) v1@671.46,508.54
pads on no net: U2.2 U2.3 U2.4 U2.6 U2.11 U2.14 U2.15 U2.16 U2.17 U2.18 U2.19 U2.20 U2.22 U2.25 U2.26 U2.27 U2.28 U2.29 U2.32 U2.33 U2.38 U2.39 U2.40 U2.43 U2.46 U3.A3 U3.A4 U3.A5 U3.A6 U3.A7 U3.A8 U3.A9 U3.A10 U3.A11 U3.A12 U3.B1 U3.B2 U3.B3 U3.B6 U3.B7 U3.B8 U3.B9 U3.B10 U3.B11 U3.B12 Y1.1

## Keep-outs
Keep-Out Layer:
  lines w6: -0.01,452.76 -0.01,779.53 cw(c78.73,779.53) 78.73,858.27 527.54,858.27 527.54,795.28 881.87,795.28 881.87,858.27 1106.88,858.27 cw(c1106.88,740.16) 1190.39,823.67 1203.83,810.24 1248.85,765.21 cw(c1165.34,681.7) 1283.45,681.7 1283.45,618.02 1283.45,531.5 1165.34,531.5 1165.34,157.48 1066.91,157.48 1066.91,118.11 cw(c948.8,118.11) 948.8,0 78.73,0 78.73,452.76 -0.01,452.76